# Altium PCB PCB.PcbDoc
Units mm, origin at the board's own origin, x right, y up, seen from the top; angles counter-clockwise.
Board outline 44.8 x 16.7 mm, 2 copper layers (Top Layer, Bottom Layer), stack 0.98 mm thick; 4 components, 11 nets, 44 pads, 18 vias.
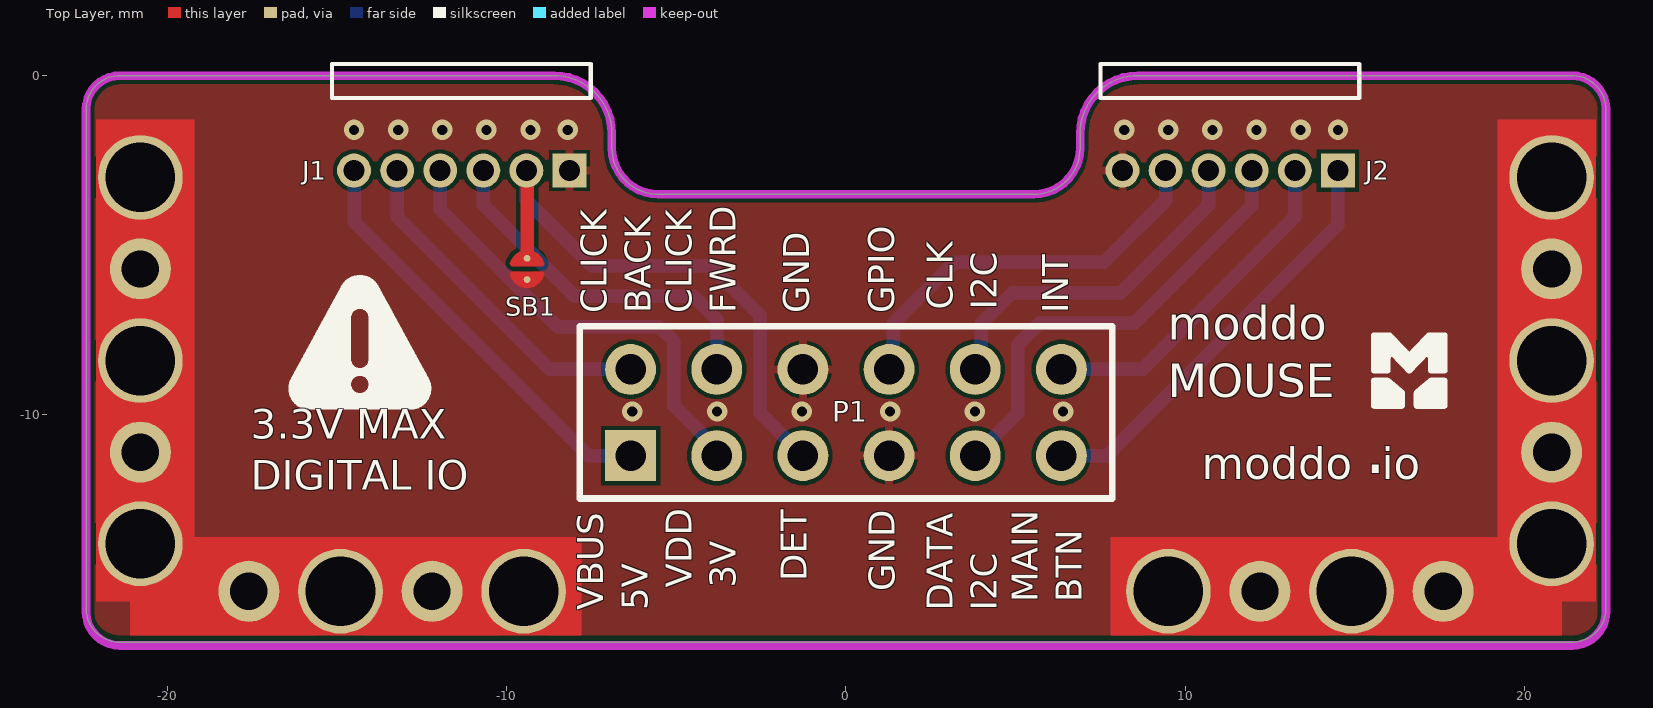
[diagram p0: Top Layer view]
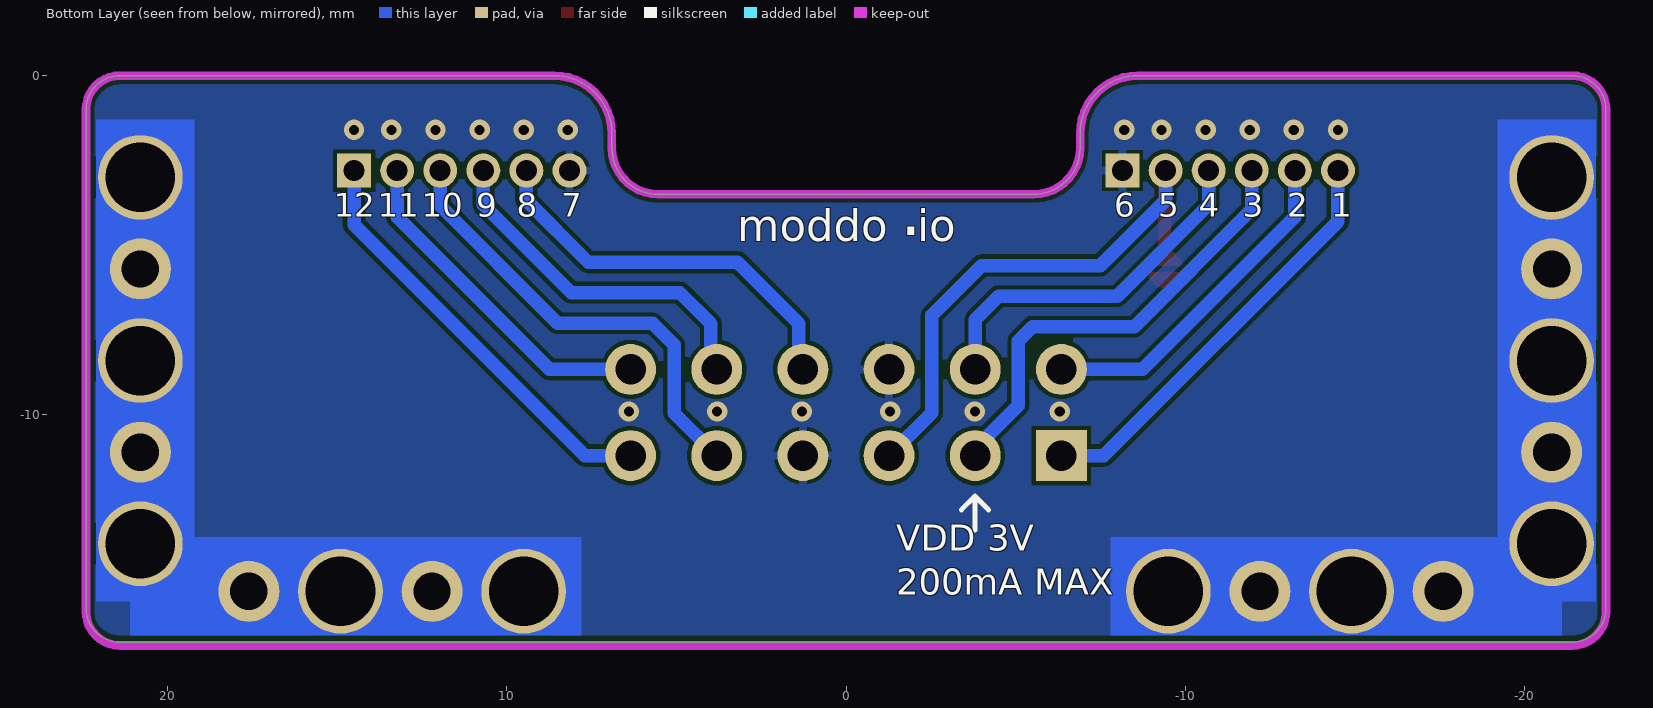
[diagram p1: Bottom Layer view, seen from below]
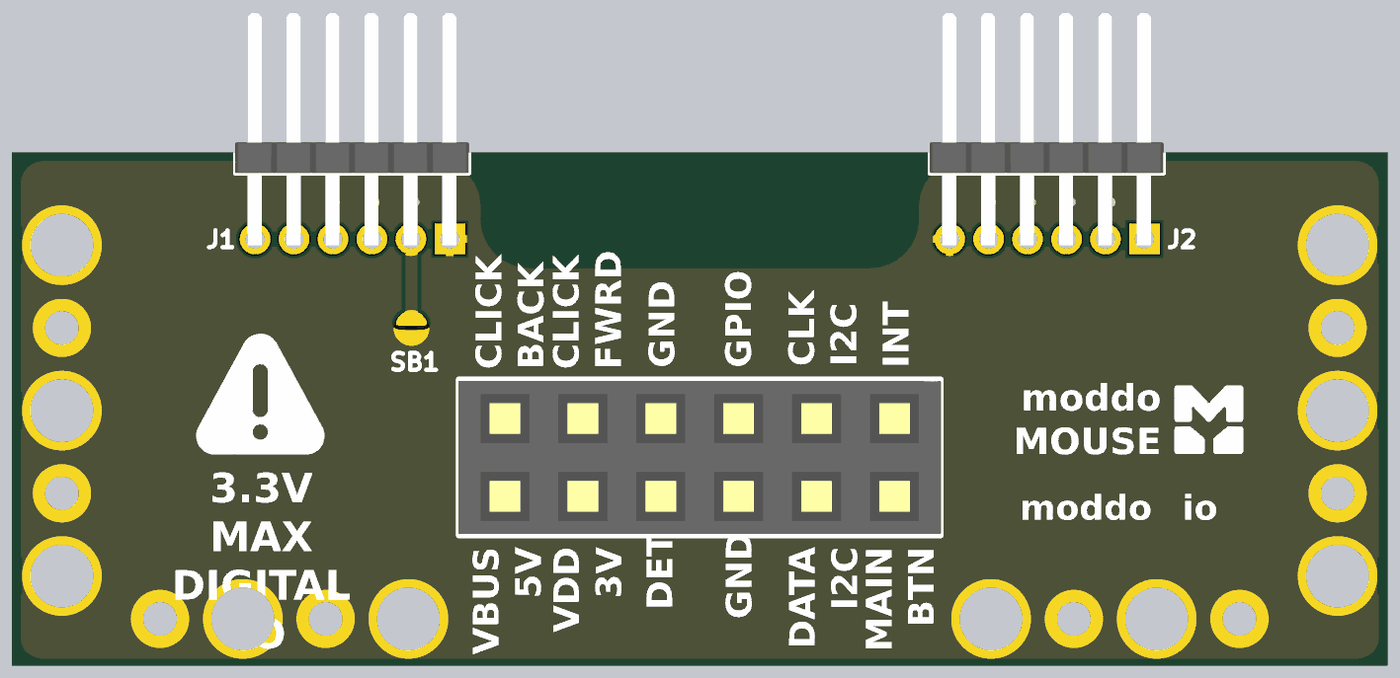
[diagram p2: 3D render of the assembled board from above, using the file's embedded part models]

## Layer stack, top to bottom
Top Solder: solder mask 0.0102, Solder Resist, Dk 3.5
Top Layer: signal copper 0.0356
Dielectric 1: dielectric 0.9086, FR-4, Dk 4.8
Bottom Layer: signal copper 0.0356
Bottom Solder: solder mask 0.0102, Solder Resist, Dk 3.5

## Board outline
-21.4,-16.7 cw(c-21.4,-15.7) -22.4,-15.7 -22.4,-1 cw(c-21.4,-1) -21.4,0 -8.6,0 -8.607,0 cw(c-8.607,-1.708) -6.899,-1.708 -6.899,-2.136 ccw(c-5.537,-2.136) -5.537,-3.499 -5.5,-3.5 5.5,-3.5 5.537,-3.499 ccw(c5.537,-2.136) 6.899,-2.136 6.899,-1.708 cw(c8.607,-1.708) 8.607,0 8.6,0 21.4,0 cw(c21.4,-1) 22.4,-1 22.4,-15.7 cw(c21.4,-15.7) 21.4,-16.7

## Design rules (kind name [scope] priority, off if disabled: settings)
BoardOutlineClearance [All] p1: gap=0.2 ignorepadtopadclearanceinfootprint=FALSE
Clearance GND_bot [InNamedPolygon('GND_bot')] p1: gap=0.2 ignorepadtopadclearanceinfootprint=FALSE
Clearance GND_top [InNamedPolygon('GND_top')] p2: gap=0.1 ignorepadtopadclearanceinfootprint=FALSE
Clearance [All] p3: gap=0.12 ignorepadtopadclearanceinfootprint=FALSE
HoleSize [All] p1: absolutevalues=TRUE maxlimit=10 minlimit=0.025 maxpercent=80.000 minpercent=20.000
MinimumSolderMaskSliver [All] p1: minsoldermaskwidth=0.05
PolygonConnect [All] p1: thpad.connectstyle=Relief thpad.reliefconductorwidth=0.254 thpad.reliefentries=4 thpad.polygonreliefangle="90 Angle" thpad.airgapwidth=0.1 smdpad.connectstyle=Relief smdpad.reliefconductorwidth=0.254 smdpad.reliefentries=4 smdpad.polygonreliefangle="90 Angle" smdpad.airgapwidth=0.1 via.connectstyle=Direct via.reliefconductorwidth=0.254 via.reliefentries=4 via.polygonreliefangle="90 Angle" via.airgapwidth=0.254
RoutingVias [All] p1: holewidth=0.3 width=0.4 viastyle="Through Hole" minholewidth=0.3 minwidth=0.4 maxholewidth=2 maxwidth=10
SilkToSilkClearance [All] p1: silktosilkclearance=0.01
SilkToSolderMaskClearance [IsPad] p1: minsilkscreentomaskgap=0.001 clearancetoexposedcopper=TRUE
SolderMaskExpansion [All] p1: expansion=0.05 istentingtop=FALSE
SupplyNets "Schematic Supply Nets" [InNet('VDD_EXP')] p1: voltage=0.000
SupplyNets "Schematic Supply Nets_2" [InNet('VBUS')] p2: voltage=0.000
SupplyNets "Schematic Supply Nets_1" [InNet('GND')] p3: voltage=0.000
UnRoutedNet [All] p1: checkbadconnections=TRUE
Width [All] p1: maxlimit=2.54 minlimit=0.089 preferedwidth=0.254
25 further rules are at their usual default settings.

## Components (designator, comment, footprint, x,y, rotation, side; value= is the part's Value field where it differs from the comment)
J1 "1.27mm_6pins" 1.27mm_6pins_MaleHeader_RightAngle -8.15,-2.8 r180 top
J2 "1.27mm_6pins" 1.27mm_6pins_MaleHeader_RightAngle 14.5,-2.8 r180 top
P1 "Header 6X2" HEADER_2_54_F_2X6 -6.35,-11.2 r0 top
SB1 "Solderbridge" Solderbridge -9.4,-5.7 r90 top

## Footprints (in the part's own frame and the unit in brackets; to place one, negate y for a bottom-side part, rotate by r counter-clockwise, add the part's x,y. Pads: shape width x height; smd on the part's side, far side on the other; paste and mask are expansions set on the pad)
1.27mm_6pins_MaleHeader_RightAngle [mm]
  rect 1x1 hole 0.62 mask+0.05: 1(0,0)
  round 1 hole 0.62 mask+0.05: 2(1.27,0) 3(2.54,0) 4(3.81,0) 5(5.08,0) 6(6.35,0)
  silkscreen extent -0.63,-3.14 7,-2.14, body extent -0.62,-7.4 7,0.25, height 2.02
HEADER_2_54_F_2X6 [mm]
  rect 1.5x1.5 hole 0.9: 1(0,0)
  round 1.5 hole 0.9: 2(0,2.54) 3(2.54,0) 4(2.54,2.54) 5(5.08,0) 6(5.08,2.54) 7(7.62,0) 8(7.62,2.54) 9(10.16,0) 10(10.16,2.54) 11(12.7,0) 12(12.7,2.54)
  silkscreen extent -1.5,-1.27 14.2,3.81, body extent -1.52,-1.23 14.22,3.77, height 8.55
Solderbridge [mm]
  round 0.2 smd paste-10: 1(-0.312,0) 2(0.312,0)
  Top Layer region: -0.077,-0.432 -0.152,-0.505 -0.271,-0.467 -0.335,-0.424 -0.409,-0.351 -0.462,-0.292 -0.521,-0.193 -0.549,-0.099 -0.544,0.122 -0.518,0.193 -0.434,0.33 -0.351,0.411 -0.259,0.469 -0.157,0.5 -0.107,0.483 -0.077,0.43
  Top Layer region: 0.077,0.432 0.152,0.505 0.271,0.467 0.335,0.424 0.409,0.351 0.462,0.292 0.521,0.193 0.549,0.099 0.544,-0.122 0.518,-0.193 0.434,-0.33 0.351,-0.411 0.259,-0.469 0.157,-0.5 0.107,-0.483 0.077,-0.43
  Top Layer lines w0.152: -0.153,0.431 ccw(c-0.042,0) -0.471,0.118 ccw(c-0.042,0) -0.471,-0.118 ccw(c-0.042,0) -0.153,-0.431 ; 0.153,0.431 cw(c0.042,0) 0.487,0 cw(c0.042,0) 0.312,-0.353 cw(c0.042,0) 0.153,-0.431

## Part data
J1 J2: library part 1.27mm_6pins_male_rightangle
P1: "Header, 6-Pin, Dual row", LatestRevisionDate=17-Jul-2002, LatestRevisionNote="Re-released for DXP Platform.", Publisher="Altium Limited"
SB1: library part SOLDERBRIDGE, Artikkelnr Noca=N.A., Artikkelnr Simpro=N.A., Footprint Doc=Solderbridge, LatestRevisionDate=2009-12-14, Part Number=Solderbridge, Pin Count=2, Published=2009-12-14, Publisher="Nordic Semiconductor"

## Free pads (board coordinates)
  round 2.5 hole 2.05: ""(-20.8,-13.8) ""(-20.8,-8.4) ""(-20.8,-3) ""(-14.9,-15.2) ""(-9.5,-15.2) ""(9.5,-15.2) ""(14.9,-15.2) ""(20.8,-13.8) ""(20.8,-8.4) ""(20.8,-3)
  round 1.8 hole 1.1: ""(-20.8,-11.1) ""(-20.8,-5.7) ""(-17.6,-15.2) ""(-12.2,-15.2) ""(12.2,-15.2) ""(17.6,-15.2) ""(20.8,-11.1) ""(20.8,-5.7)

## Via types
v1: diameter 0.6, hole 0.3, Top Layer to Bottom Layer, tented both sides, 18 vias

## Nets (pads, with @x,y where several pads share a name; then routed paths per layer and width w, separated by ;. In a path a pad name is that pad's centre, name@x,y a point inside that pad or via, vN(x,y) a via of type N, cw(c..) or ccw(c..) an arc to the next point about the centre after c; other vN are vias at no path point)
BACK_DETECT: J1.2 P1.5 SB1.2 | length 16.5
  Top Layer w0.4: J1.2 -9.4,-2.82 -9.4,-5.213 SB1.2
  Bottom Layer w0.4: J1.2@-9.42,-2.7 J1.2 -9.42,-3.68 -7.5,-5.6 -4,-5.6 -2.532,-7.068 -2.532,-9.938 P1.5
BACK_GPIO: J2.5 P1.8 | length 11.9
  Bottom Layer w0.4: P1.8 1.39,-8.54 1.39,-7.31 3.2,-5.5 7.6,-5.5 9.42,-3.68 J2.5@9.42,-2.7
BACK_INT: J2.2 P1.12 | length 10.2
  Bottom Layer w0.4: P1.12 8.74,-8.66 13.23,-4.17 J2.2@13.23,-2.7
BUTTON: J2.1 P1.11 | length 12.7
  Bottom Layer w0.4: P1.11 7.7,-11.2 14.5,-4.4 J2.1@14.5,-2.7
CLICK_BACKWARD: J1.5 P1.2 | length 10.2
  Bottom Layer w0.4: J1.5@-13.23,-2.7 -13.23,-4.17 -8.74,-8.66 P1.2
CLICK_FORWARD: J1.3 P1.4 | length 10.9
  Bottom Layer w0.4: J1.3@-10.69,-2.7 -10.69,-3.81 -8,-6.5 -4.5,-6.5 -3.81,-7.19 P1.4
GND: J1.1 J2.6 P1.6 P1.7 pad. SB1.1
  other v1: -6.3,-9.9 -3.8,-9.9 -1.3,-9.9 1.3,-9.9 3.8,-9.9 6.4,-9.9 -14.5,-1.6 -13.2,-1.6 -11.9,-1.6 -10.6,-1.6 -9.3,-1.6 -8.2,-1.6 8.2,-1.6 9.5,-1.6 10.8,-1.6 12.1,-1.6 13.4,-1.6 14.5,-1.6
I2C_BACK_CLK: J2.4 P1.10 | length 10.7
  Bottom Layer w0.4: P1.10 3.99,-8.48 3.99,-7.31 4.9,-6.4 8.1,-6.4 10.69,-3.81 J2.4@10.69,-2.7
I2C_BACK_DATA: J2.3 P1.9 | length 13.5
  Bottom Layer w0.4: P1.9 5.06,-9.95 5.06,-7.94 5.7,-7.3 8.5,-7.3 11.96,-3.84 J2.3@11.96,-2.7
VBUS: J1.6 P1.1 | length 12.6
  Bottom Layer w0.4: J1.6@-14.5,-2.7 -14.5,-4.3 -7.6,-11.2 P1.1
VDD_EXP: J1.4 P1.3 | length 13.6
  Bottom Layer w0.4: J1.4@-11.96,-2.7 -11.96,-3.94 -8.5,-7.4 -5.5,-7.4 -5.073,-7.827 -5.073,-9.727 -3.81,-10.99 P1.3

## Polygon pours and split planes (outlines as drawn)
GND on Top Layer "GND_L01_P000" (solid, pour order 0): -21.4,-16.7 cw(c-21.4,-15.7) -22.4,-15.7 -22.4,-1 cw(c-21.4,-1) -21.4,0 -8.6,0 -8.607,0 cw(c-8.607,-1.708) -6.899,-1.708 -6.899,-2.136 ccw(c-5.537,-2.136) -5.537,-3.499 -5.5,-3.5 5.5,-3.5 5.537,-3.499 ccw(c5.537,-2.136) 6.899,-2.136 6.899,-1.708 cw(c8.607,-1.708) 8.607,0 8.6,0 21.4,0 cw(c21.4,-1) 22.4,-1 22.4,-15.7 cw(c21.4,-15.7) 21.4,-16.7
GND on Bottom Layer "GND_L02_P001" (solid, pour order 1): -21.4,-16.7 cw(c-21.4,-15.7) -22.4,-15.7 -22.4,-1 cw(c-21.4,-1) -21.4,0 -8.6,0 -8.607,0 cw(c-8.607,-1.708) -6.899,-1.708 -6.899,-2.136 ccw(c-5.537,-2.136) -5.537,-3.499 -5.5,-3.5 5.5,-3.5 5.537,-3.499 ccw(c5.537,-2.136) 6.899,-2.136 6.899,-1.708 cw(c8.607,-1.708) 8.607,0 8.6,0 21.4,0 cw(c21.4,-1) 22.4,-1 22.4,-15.7 cw(c21.4,-15.7) 21.4,-16.7

## Keep-outs
Keep-Out Layer:
  lines w0.254: -8.607,0 cw(c-8.607,-1.708) -6.899,-1.708 -6.899,-2.136 ccw(c-5.537,-2.136) -5.537,-3.499 ; -8.6,0 -21.4,0 ccw(c-21.4,-1) -22.4,-1 -22.4,-15.8 ccw(c-21.4,-15.8) -21.4,-16.8 21.4,-16.8 ccw(c21.4,-15.8) 22.4,-15.8 22.4,-1 ccw(c21.4,-1) 21.4,0 8.6,0 ; -5.5,-3.5 5.5,-3.5 ; 5.537,-3.499 ccw(c5.537,-2.136) 6.899,-2.136 6.899,-1.708 cw(c8.607,-1.708) 8.607,0

## Other copper
Top Layer:
  region net GND: 22.1,-1.3 19.2,-1.3 19.2,-15.5 22.1,-15.5
  region net GND: 21.1,-16.5 21.1,-13.6 7.8,-13.6 7.8,-16.5
  region net GND: -7.8,-16.5 -7.8,-13.6 -21.1,-13.6 -21.1,-16.5
  rectangle net GND: -22.1,-15.5 -19.2,-1.3
Bottom Layer:
  region net GND: 22.1,-1.3 19.2,-1.3 19.2,-15.5 22.1,-15.5
  region net GND: 21.1,-16.5 21.1,-13.6 7.8,-13.6 7.8,-16.5
  region net GND: -7.8,-16.5 -7.8,-13.6 -21.1,-13.6 -21.1,-16.5
  rectangle net GND: -22.1,-15.5 -19.2,-1.3

## Silkscreen, mask and mechanical layers (free items; w line width, h text height)
Top Overlay:
  drawing of 4 lines, arcs and shapes, not listed
  text "CLK / I2C" at 4.7,-6.9 h1.3 r90
  text "CLICK / BACK" at -5.5,-7 h1.3 r90
  text "CLICK / FWRD" at -3,-7 h1.3 r90
  text "GND" at -0.831,-7.002 h1.3 r90
  text "GPIO" at 1.669,-7.002 h1.3 r90
  text "INT" at 6.8,-7 h1.3 r90
  text "moddo / MOUSE" at 9.482,-9.804 h1.7
  text "moddo" at 10.489,-12.214 h1.6
  text "." at 15.289,-12.214 h2.5
  text "io" at 15.789,-12.214 h1.6
  text "3.3V MAX / DIGITAL IO" at -17.55,-12.5 h1.5
  text "DET" at -0.9,-14.9 h1.3 r90
  text "VDD / 3V" at -3,-15.102 h1.3 r90
  text "GND" at 1.686,-15.2 h1.3 r90
  text "MAIN / BTN" at 7.2,-15.525 h1.3 r90
  text "VBUS / 5V" at -5.6,-15.76 h1.3 r90
  text "DATA / I2C" at 4.7,-15.771 h1.3 r90
Bottom Overlay:
  lines w0.15: -4.2,-12.8 -3.8,-12.4 ; -3.8,-13.4 -3.8,-12.4 ; -3.4,-12.8 -3.8,-12.4
  text "1" at -14.3,-4.4 h1.2
  text "2" at -13,-4.4 h1.2
  text "3" at -11.7,-4.4 h1.2
  text "4" at -10.4,-4.4 h1.2
  text "5" at -9.2,-4.4 h1.2
  text "6" at -7.9,-4.4 h1.2
  text "7" at 8.4,-4.4 h1.2
  text "8" at 9.7,-4.4 h1.2
  text "9" at 10.9,-4.4 h1.2
  text "10" at 12.5,-4.4 h1.2
  text "11" at 13.8,-4.4 h1.2
  text "12" at 15.1,-4.4 h1.2
  text "io" at -2.1,-5.2 h1.6
  text "." at -1.6,-5.2 h2.5
  text "moddo" at 3.2,-5.2 h1.6
  text "VDD 3V / 200mA MAX" at -1.475,-15.555 h1.3